# Altium PCB WOLFMAN.PcbDoc (part 1 of 2)
Units mm, origin at the board's own origin, x right, y up, seen from the top; angles counter-clockwise.
Board outline 40.9 x 21.1 mm, 4 copper layers (Top Layer, Signal Layer 1, Signal Layer 2, Bottom Layer), stack 0.778 mm thick; 122 components, 134 nets, 498 pads, 111 vias.
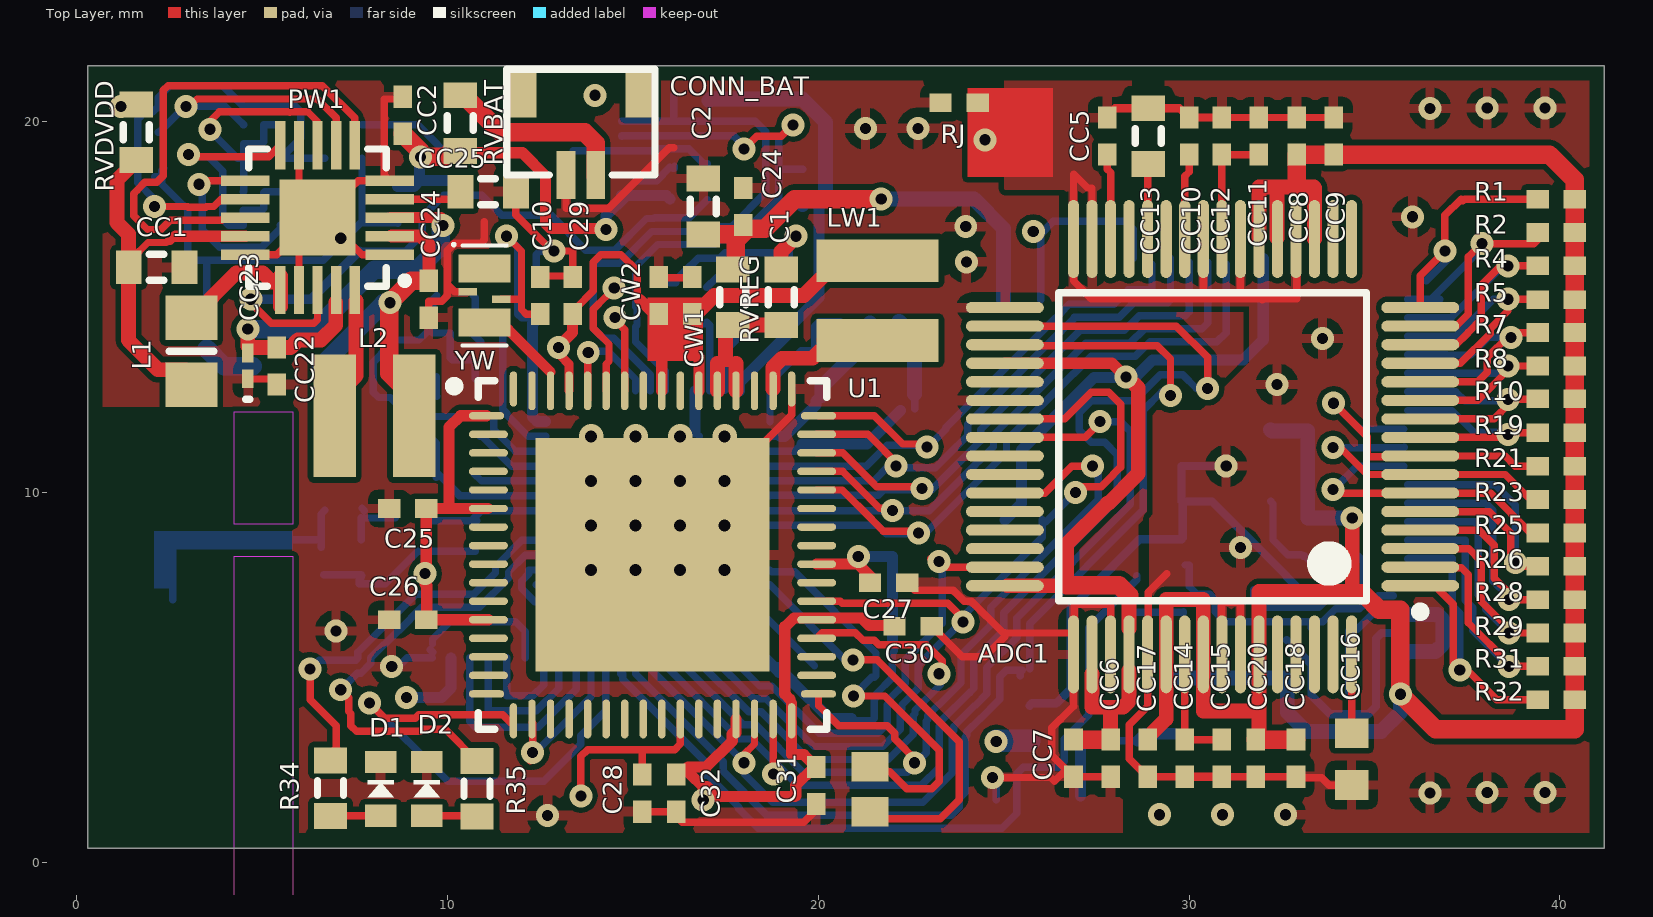
[diagram p0: Top Layer view]
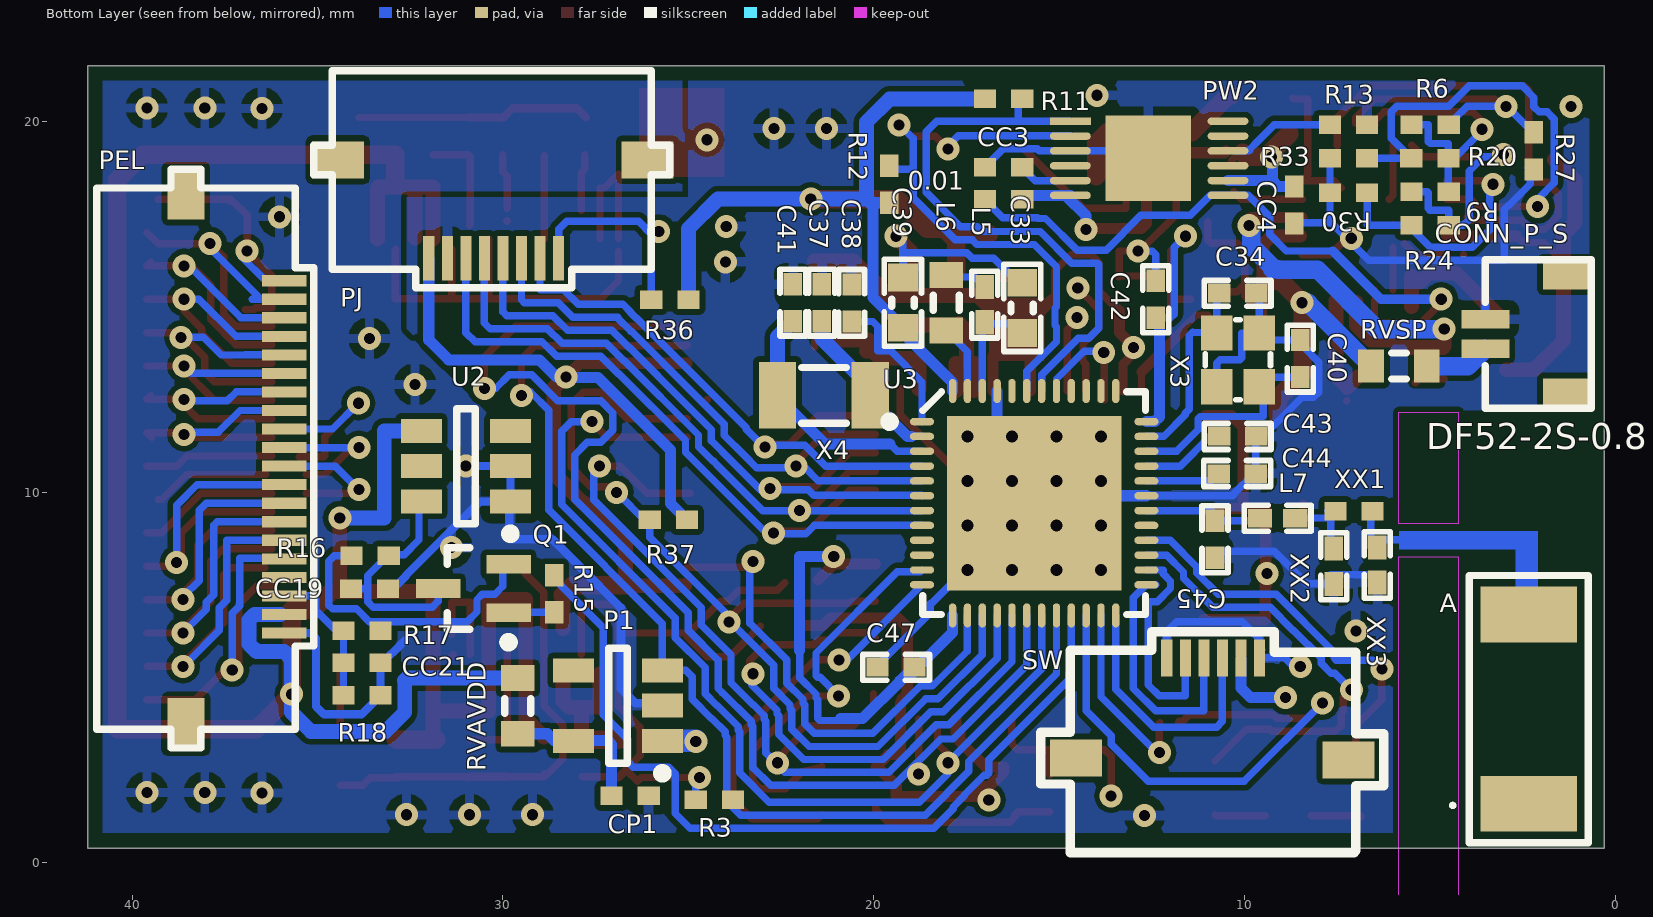
[diagram p1: Bottom Layer view, seen from below]
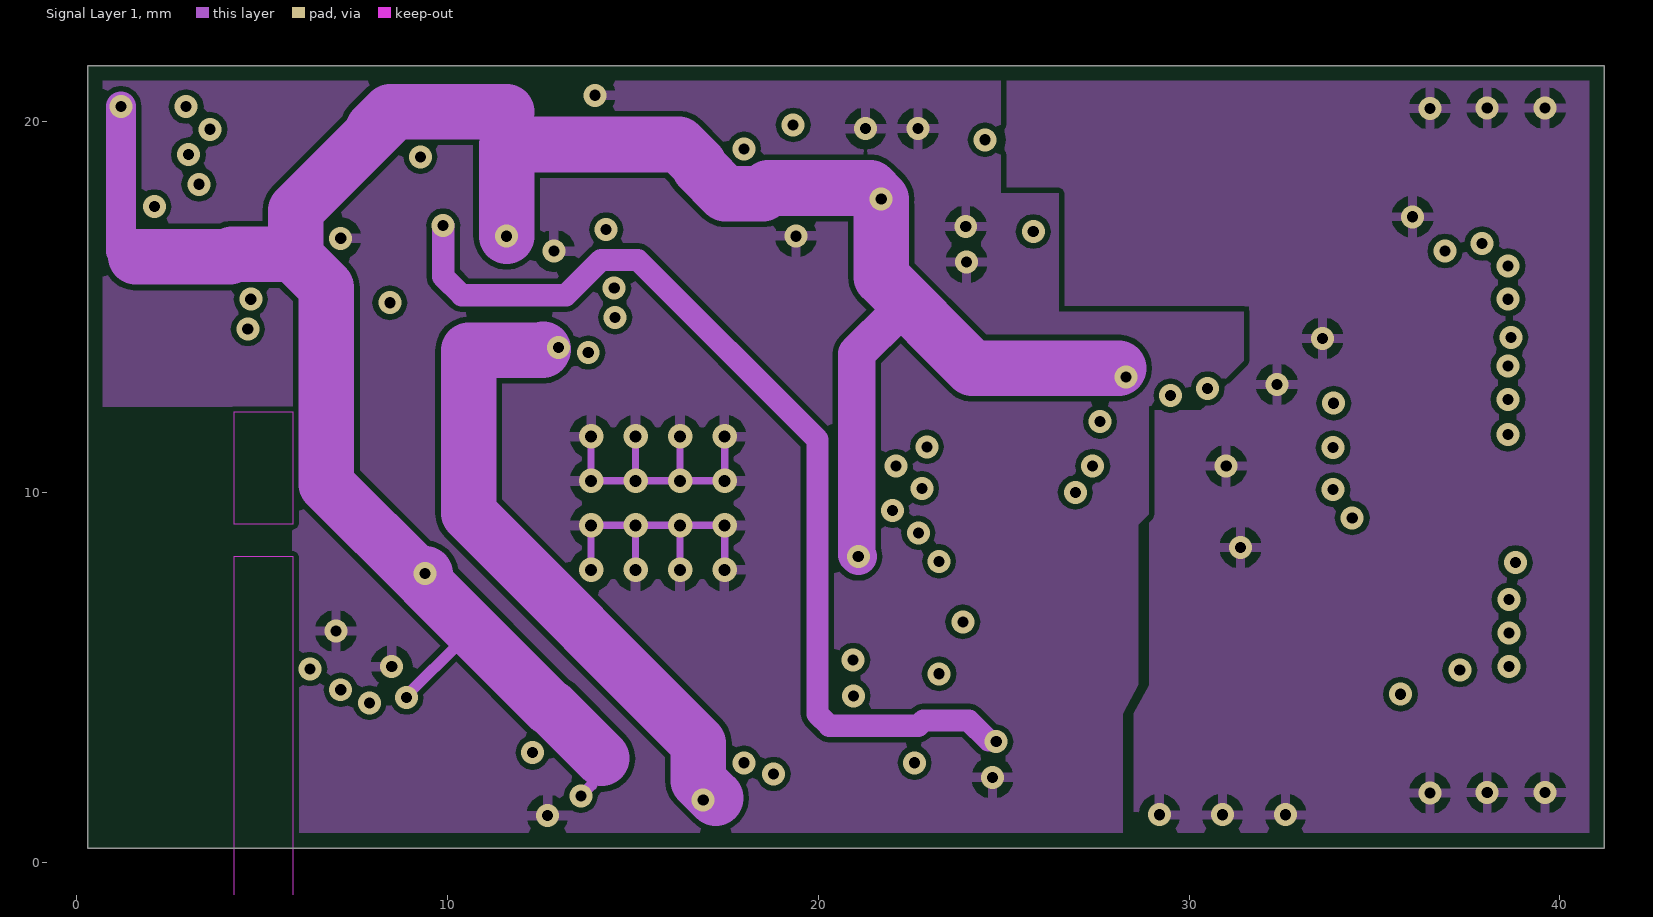
[diagram p2: Signal Layer 1]
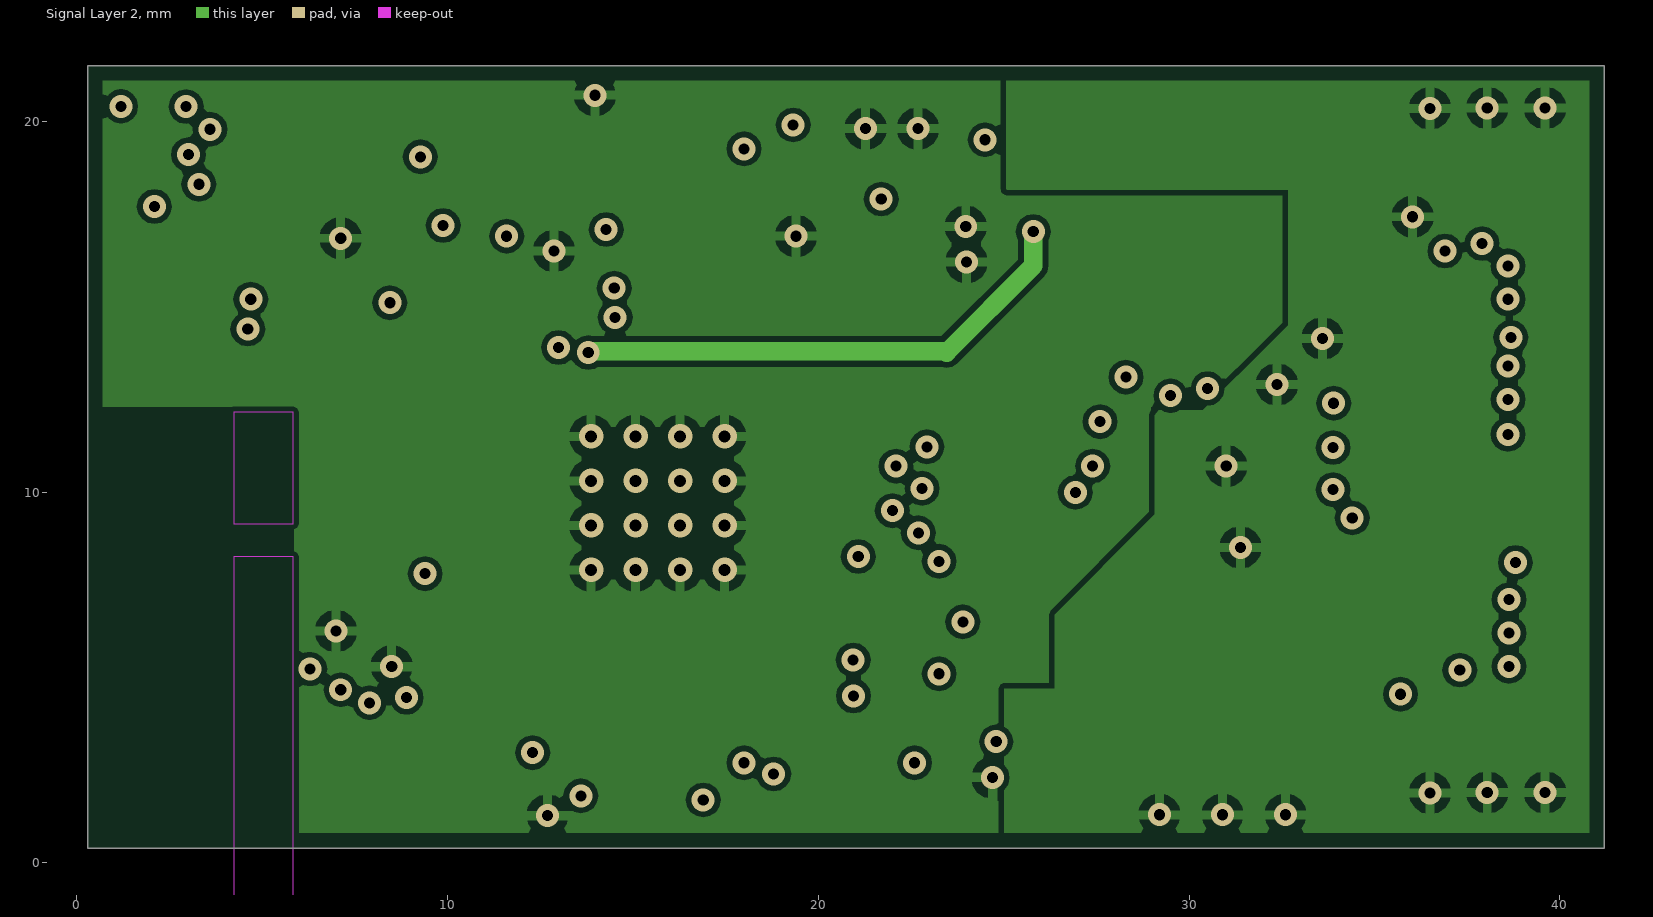
[diagram p3: Signal Layer 2]

## Layer stack, top to bottom
Top Solder: solder mask 0.0102, Solder Resist, Dk 3.5
Top Layer: signal copper 0.0356
Dielectric 1: core 0.254, FR-4, Dk 4.2
Signal Layer 1: signal copper 0.036
Dielectric 3: prepreg 0.127, Dk 4.2
Signal Layer 2: signal copper 0.036
Dielectric 2: core 0.254, Dk 4.2
Bottom Layer: signal copper 0.0356
Bottom Solder: solder mask 0.0102, Solder Resist, Dk 3.5

## Board outline
0.3,21.5 0.3,0.4 41.2,0.4 41.2,21.5

## Design rules (kind name [scope] priority, off if disabled: settings)
BoardOutlineClearance [All] p1: gap=0.406 ignorepadtopadclearanceinfootprint=FALSE
Clearance [All] p1: gap=0.15 ignorepadtopadclearanceinfootprint=FALSE except(0: Arc-Hole Track-Hole SMDPad-Hole THPad-Hole Via-Hole Fill-Hole Poly-Hole Region-Hole Text-Hole)
PolygonConnect [All] p1: connectstyle=Relief reliefconductorwidth=0.254 reliefentries=4 polygonreliefangle="90 Angle" airgapwidth=0.254
RoutingVias [All] p1: holewidth=0.3 width=0.62 viastyle="Through Hole" minholewidth=0.3 minwidth=0.62 maxholewidth=0.3 maxwidth=0.62
SolderMaskExpansion [All] p1: expansion=0.102
Width [All] p1: maxlimit=25 minlimit=0.2 preferedwidth=0.2 toplayer_maxwidth=2.5 midlayer1_maxwidth=2.5 midlayer2_maxwidth=2.5 minimp=50.000000 maximp=50.000000 favimp=50.000000
30 further rules are at their usual default settings.

## Classes and differential pairs
component class 03_ANALOG: ADC1 CC5 CC6 CC7 CC8 CC9 CC10 CC11 CC12 CC13 CC14 CC15 CC16 CC17 CC18 CC19 CC20 CC21 PEL Q1 R1 R2 R4 R5 R7 R8 R10 R15 R16 R17 R18 R19 R21 R23 R25 R26 R28 R29 R31 R32 R37 RJ U2
component class 04_POWER: 0.01 CC1 CC2 CC3 CC4 CC22 CC23 CC24 CC25 CC? CONN_BAT CONN_P_S CP1 L1 L2 P1 PW1 PW2 R6 R9 R11 R12 R13 R14 R20 R24 R27 R30 R33 R? RVAVDD RVBAT RVDVDD RVSP
component class 01_MRWOLF: C1 C2 C10 C24 C25 C26 C27 C28 C29 C30 C31 C32 CW1 CW2 LW1 PJ R36 RVREG U1 YW
component class 02_NRF52832: A C33 C34 C37 C38 C39 C40 C41 C42 C43 C44 C45 C47 D1 D2 L5 L6 L7 R3 R34 R35 SW U3 X3 X4 XX1 XX2 XX3

## Components (designator, comment, footprint, x,y, rotation, side; value= is the part's Value field where it differs from the comment)
0.01 "0.01" 0402 16.5,17.893 r0 bottom (schematic designator =Value)
A "FR05-S1-N-0-102" DFN510P700X220-2N 2.34,4.125 r90 bottom
ADC1 "ADS1298IPAG" LQFP64_M 30.634,11.224 r180 top
C1 "NC" J1-0603 19,15.257 r270 top
C2 "NC" J1-0603 16.9,17.7 r270 top
C10 "100nF" 0402 12.5,15.3 r270 top
C24 "100nF" 0402 17.975,17.7 r270 top
C25 "100nF" 0402 8.932,9.557 r0 top
C26 "100nF" 0402 8.932,6.557 r0 top
C27 "100nF" 0402 21.9,7.557 r180 top
C28 "100nF" 0402 15.25,1.883 r90 top
C29 "100nF" 0402 13.381,15.3 r270 top
C30 "100nF" 0402 22.561,6.379 r180 top
C31 "100nF" 0402 19.945,2.09 r90 top
C32 "100nF" 0402 16.167,1.883 r90 top
C33 "1.0µF" CAPC1608X06L 16,14.968 r270 bottom
C34 "12pF" CAPC1005X04L 10.189,15.357 r180 bottom
C37 "12pF" CAPC1005X04L 21.4,15.107 r90 bottom
C38 "100nF" CAPC1005X04L 20.6,15.1 r90 bottom
C39 "4.7µF" CAPC1608X06L 19.215,15.107 r90 bottom
C40 "12pF" CAPC1005X04L 8.5,13.6 r90 bottom
C41 "12pF" CAPC1005X04L 22.18,15.107 r90 bottom
C42 "100nF" CAPC1005X04L 12.4,15.2 r90 bottom
C43 "100pF" CAPC1005X04L 10.189,11.5 r180 bottom
C44 "N.C." CAPC1005X04L 10.2,10.5 r0 bottom
C45 "0.8pF" CAPC1005X04L 10.8,8.728 r90 bottom
C47 "100nF" CAPC1005X04L 19.4,5.272 r0 bottom
CC1 "22uF" J1-0603 2.16,16.06 r180 top
CC2 "10uF" 0402 8.8,20.16 r270 top
CC3 "0.47UF" 0402 16.5,18.755 r180 bottom
CC4 "1UF" 0402 8.664,17.742 r90 bottom
CC5 "Cap Semi" 0402 27.79,19.6 r270 top
CC6 "100nF" 0402 27.884,2.826 r90 top
CC7 "1uF" 0402 26.884,2.826 r90 top
CC8 "Cap Semi" 0402 32.9,19.6 r270 top
CC9 "Cap Semi" 0402 33.9,19.6 r270 top
CC10 "Cap Semi" 0402 30,19.6 r270 top
CC11 "Cap Semi" 0402 31.884,19.6 r270 top
CC12 "Cap Semi" 0402 30.884,19.6 r270 top
CC13 "Cap Semi" J1-0603 28.9,19.6 r270 top
CC14 "Cap Semi" 0402 29.884,2.826 r90 top
CC15 "Cap Semi" 0402 30.884,2.826 r90 top
CC16 "Cap Semi" 1608[0603] 34.384,2.8 r90 top
CC17 "100nF" 0402 28.884,2.826 r90 top
CC18 "10uF" 0402 32.884,2.826 r90 top
CC19 "100nF" 0402 33.6,7.398 r0 bottom
CC20 "Cap Semi" 0402 31.8,2.826 r90 top
CC21 "100nF" 0402 33.8,5.4 r0 bottom
CC22 "4.7uF" 0402 5.4,13.4 r90 top
CC23 "100nF" 0603 4.62,13.4 r90 top
CC24 "4.7uF" 0402 9.5,15.2 r90 top
CC25 "10nF" J1-0603 11.1,18.1 r180 top
CONN_BAT "DF52-2S-0.8H(21)" DF52-2S-0.8H(21) 13.6,20.3 r180 top
CONN_P_S "DF52-2S-0.8H(21)" DF52-2S-0.8H(21) 1.76,14.264 r90 bottom
CP1 "1uF" 0402 26.57,1.81 r0 bottom
CW1 "4.7uF" 0402 16.6,15.3 r270 top
CW2 "100nF" 0402 15.7,15.3 r270 top
D1 "LED Red" DIOC1608X08L 8.2,2 r90 top
D2 "LED Orange" DIOC1608X08L 9.446,2 r90 top
L1 "MLZ2012N100L" 6-0805_N 3.1,13.8 r270 top
L2 "LQH3NPZ220MJRL" 1212_PCK 8.56,20.657 r180 top
L5 "LQW15AN15NJ00D" INDC1005X04L 17.005,15.055 r90 bottom
L6 "L0603B100KDWFT" J1-0603 18.05,15.107 r270 bottom
L7 "3.9nH" INDC1005X04L 9.11,9.297 r180 bottom
LW1 "SRN4026-220M" 1212_PCK 13,15.687 r270 top
P1 "ADP122AUJZ_2p7" UJ-5_N 26.9,4.241 r0 bottom
PEL "MOLEX_5051102091" MOLEX_5051102091 35.95,10.95 r90 bottom
PJ "MOLEX_5051100892" MOLEX_5051100892 30.25,17.757 r180 bottom
PW1 "BQ25570RGRT" VQFN20 6.5,17.4 r90 top
PW2 "BQ27441-G1" DRZ12_SMALL 15.2,20 r180 bottom
Q1 "PMSS3906" SOT323_N 30.8,7.4 r0 bottom
R1 "4.7K" 0402 39.9,17.9 r180 top
R2 "4.7K" 0402 39.9,17 r180 top
R3 "100K" 0402 24.3,1.7 r0 bottom
R4 "4.7K" 0402 39.9,16.1 r180 top
R5 "4.7K" 0402 39.9,15.187 r180 top
R6 "7M32" 0402 5,19.9 r180 bottom
R7 "4.7K" 0402 39.9,14.304 r180 top
R8 "4.7K" 0402 39.9,13.4 r180 top
R9 "1M24" 0402 5,18.1 r0 bottom
R10 "4.7K" 0402 39.9,12.512 r180 top
R11 "1M" 0402 16.5,20.6 r180 bottom
R12 "1M" 0402 19.581,18.3 r90 bottom
R13 "10K" 0402 7.2,19.9 r180 bottom
R15 "4.7K" 0402 28.62,7.258 r270 bottom
R16 "4.7K" 0402 33.582,8.288 r0 bottom
R17 "4.7K" 0402 33.8,6.265 r0 bottom
R18 "22K" 0402 33.8,4.518 r0 bottom
R19 "4.7K" 0402 39.9,11.6 r180 top
R20 "4M22" 0402 5.006,19 r0 bottom
R21 "4.7K" 0402 39.9,10.7 r180 top
R23 "4.7K" 0402 39.9,9.8 r180 top
R24 "6M65" 0402 5,17.192 r0 bottom
R25 "4.7K" 0402 39.9,8.897 r180 top
R26 "4.7K" 0402 39.9,8 r180 top
R27 "5M6" 0402 2.2,19.2 r270 bottom
R28 "4.7K" 0402 39.9,7.1 r180 top
R29 "4.7K" 0402 39.9,6.2 r180 top
R30 "4M99" 0402 7.2,18.069 r0 bottom
R31 "4.7K" 0402 39.9,5.3 r180 top
R32 "4.7K" 0402 39.9,4.4 r180 top
R33 "8M66" 0402 7.2,19 r0 bottom
R34 "" J1-0603 6.85,2.018 r90 top
R35 "" J1-0603 10.8,2 r90 top
R36 "NC" 0402 25.5,15.184 r180 bottom
R37 "NC" 0402 25.54,9.25 r180 bottom
RJ "0R" 0402 23.8,20.5 r0 top
RVAVDD "1" J1-0603 29.6,4.233 r90 bottom
RVBAT "1" J1-0603 10.353,19.95 r270 top
RVDVDD "1" J1-0603 1.611,19.7 r90 top
RVREG "" J1-0603 17.7,15.257 r90 top
RVSP "1" J1-0603 5.84,13.4 r0 bottom
SW "MOLEX_5051100692" MOLEX_5051100692 12.85,2.729 r0 bottom
U1 "Mr. Wolf PULP" QFN50P900X900X100_HS_NOVIAS_65M 15.533,8.307 r0 top
U2 "LT1790-2p048" SOT-23_A_N 31,10.7 r0 bottom
U3 "nRF52832-QFAA" QFN40P600X600X90-48N 15.675,9.7 r180 bottom
X3 "FA-128 32.0000MF10Z-AJ3-ND" BT-XTAL_2016 10.182,13.565 r90 bottom
X4 "ABS07AIG-32.768kHz-9-1-T" XTAL_3215 21.346,12.608 r0 bottom
XX1 "0" 0402 7.05,9.483 r180 bottom
XX2 "NC" INDC1005X04L 7.6,8 r270 bottom
XX3 "NC" INDC1005X04L 6.422,8.033 r270 bottom
YW "SIT1533AC-H5-DCC-32.768E" SiT1533-C 11,15.3 r270 top

## Footprints (in the part's own frame and the unit in brackets; to place one, negate y for a bottom-side part, rotate by r counter-clockwise, add the part's x,y. Pads: shape width x height; smd on the part's side, far side on the other; paste and mask are expansions set on the pad)
6-0805_N [mm] "Chip Resistor, Body 2.0x1.2mm, IPC Medium Density"
  rect 1.2x1.4 smd: 1(-0.9,0) 2(0.9,0)
  silkscreen extent 0,-0.6 0,0.6, body extent -1.07,-0.7 1.07,0.7, height 0.7
0402 [mm] "Chip Capacitor, Body 1.0x0.5mm, IPC High Density"
  rect 0.6x0.5 smd: 1(-0.5,0) 2(0.5,0)
  body extent -0.55,-0.3 0.55,0.3, height 1.3
0603 [mm] "Chip Inductor, Body 0.6x0.3mm, IPC High Density"
  rect 0.5x0.3 smd: 1(-0.35,0) 2(0.35,0)
  silkscreen extent -0.9,-0.05 -0.9,0.05, body extent -0.33,-0.18 0.33,0.18, height 0.55
1212_PCK [mm]
  rect 1.15x3.3 smd: 1(-0.55,8.6) 2(1.6,8.6)
1608[0603] [mm] "Chip Capacitor, Body 1.6x0.8mm, IPC High Density"
  rect 0.8x0.9 smd: 1(-0.7,0) 2(0.7,0)
  body extent -0.87,-0.48 0.87,0.48, height 1.3
BT-XTAL_2016 [mm]
  rect 0.95x0.85 smd: 1(-0.725,-0.575) 2(0.725,-0.575) 3(0.725,0.575) 4(-0.725,0.575)
  silkscreen extent -1.08,-0.88 1.08,0.88, body extent -1.05,-0.85 1.05,0.85, height 0.56
CAPC1005X04L [mm]
  rect 0.6x0.5 smd: 1(-0.5,0) 2(0.5,0)
  silkscreen extent -0.9,-0.35 0.9,0.35, body extent -0.51,-0.25 0.51,0.25, height 0.5
CAPC1608X06L [mm]
  rect 0.75x0.8 smd: 1(-0.675,0) 2(0.675,0)
  silkscreen extent -1.17,-0.5 1.17,0.5, body extent -0.8,-0.43 0.8,0.43, height 0.8
DF52-2S-0.8H(21) [mm]
  rect 0.8x1.4 smd: 0(-1.6,-0.5) 0(1.6,-0.5)
  rect 0.5x1.3 smd: 1(-0.4,1.75) 2(0.4,1.75)
  silkscreen extent -2,-1.1 2,1.75, body extent -1.9,-1.05 1.9,1.72, height 1.66
DFN510P700X220-2N [mm]
  rect 1.5x2.6 smd: 1(2.575,0) 2(-2.525,0)
  Top Layer region: 3.277,0.25 4.827,0.25 4.827,-0.25 3.277,-0.25
  Top Layer region: 4.327,3.5 4.827,3.5 4.827,-0.225 4.327,-0.225
  Keep-Out Layer region: -6.973,3.5 4.127,3.5 4.127,1.9 -6.973,1.9
  Keep-Out Layer region: 5.027,3.5 8.027,3.5 8.027,1.9 5.027,1.9
  silkscreen extent -3.57,-1.6 3.62,2.1, body extent -3.58,-1.6 3.62,1.6, height 2.2
DIOC1608X08L [mm] "Chip Diode, 2-Leads, Body 1.60x0.80mm, IPC High Density"
  rect 0.6x0.85 smd: 1(-0.725,0) 2(0.725,0)
  silkscreen extent -0.23,-0.35 0.23,0.35, body extent -0.8,-0.4 0.81,0.4, height 0.72
DRZ12_SMALL [mm]
  rect 2.3x2.3 smd: 0(2.6,-1)
  rect 1.1x0.2 smd: 1(0.5,0)
  oval 1.1x0.2 smd: 2(0.5,-0.4) 3(0.5,-0.8) 4(0.5,-1.2) 5(0.5,-1.6) 6(0.5,-2) 7(4.75,-2) 8(4.75,-1.6) 9(4.75,-1.2) 10(4.75,-0.8) 11(4.75,-0.4) 12(4.75,0)
INDC1005X04L [mm]
  rect 0.65x0.5 smd: 1(-0.475,0) 2(0.475,0)
  silkscreen extent -0.9,-0.35 0.9,0.35, body extent -0.5,-0.3 0.5,0.3, height 0.5
J1-0603 [mm] "Chip Resistor, Body 1.6x0.8mm, IPC High Density"
  rect 0.7x0.9 smd: 1(-0.75,0) 2(0.75,0)
  silkscreen extent -0.2,-0.35 0.2,0.35, body extent -0.85,-0.48 0.85,0.48, height 0.9
LQFP64_M [mm] "Thin QFP, 64-Leads, Body 10x10mm, Pitch 0.5mm, IPC Low Density"
  oval 2.1x0.3 smd: 1(-5.6,3.75) 2(-5.6,3.25) 3(-5.6,2.75) 4(-5.6,2.25) 5(-5.6,1.75) 6(-5.6,1.25) 7(-5.6,0.75) 8(-5.6,0.25) 9(-5.6,-0.25) 10(-5.6,-0.75) 11(-5.6,-1.25) 12(-5.6,-1.75) 13(-5.6,-2.25) 14(-5.6,-2.75) 15(-5.6,-3.25) 16(-5.6,-3.75) 33(5.6,-3.75) 34(5.6,-3.25) 35(5.6,-2.75) 36(5.6,-2.25) 37(5.6,-1.75) 38(5.6,-1.25) 39(5.6,-0.75) 40(5.6,-0.25) 41(5.6,0.25) 42(5.6,0.75) 43(5.6,1.25) 44(5.6,1.75) 45(5.6,2.25) 46(5.6,2.75) 47(5.6,3.25) 48(5.6,3.75)
  oval 0.3x2.1 smd: 17(-3.75,-5.6) 18(-3.25,-5.6) 19(-2.75,-5.6) 20(-2.25,-5.6) 21(-1.75,-5.6) 22(-1.25,-5.6) 23(-0.75,-5.6) 24(-0.25,-5.6) 25(0.25,-5.6) 26(0.75,-5.6) 27(1.25,-5.6) 28(1.75,-5.6) 29(2.25,-5.6) 30(2.75,-5.6) 31(3.25,-5.6) 32(3.75,-5.6) 49(3.75,5.6) 50(3.25,5.6) 51(2.75,5.6) 52(2.25,5.6) 53(1.75,5.6) 54(1.25,5.6) 55(0.75,5.6) 56(0.25,5.6) 57(-0.25,5.6) 58(-0.75,5.6) 59(-1.25,5.6) 60(-1.75,5.6) 61(-2.25,5.6) 62(-2.75,5.6) 63(-3.25,5.6) 64(-3.75,5.6)
  silkscreen extent -5.72,-4.15 4.15,4.57, body extent -5,-5 5,5, height 1.6
MOLEX_5051100692 [mm] "FFC & FPC Connectors 0.5 FPC ZIF BTM CONT EMBT PKG 6Ckt"
  rect 1.4x1 smd: 0(-5.65,-0.05) 0(1.7,-0.1)
  rect 0.3x1 smd: 1(-3.25,-2.8) 2(-2.75,-2.8) 3(-2.25,-2.8) 4(-1.75,-2.8) 5(-1.25,-2.8) 6(-0.75,-2.8)
  silkscreen extent -6.6,-3.5 2.65,2.45, body extent -6.25,-3 2.25,2.3, height 1.88
MOLEX_5051100892 [mm] "CONN FCC 8 poles, 0.5mm"
  rect 1.4x1 smd: 0(-4.2,1.2) 0(4.15,1.2)
  rect 0.3x1.2 smd: 1(-1.75,-1.45) 2(-1.25,-1.45) 3(-0.75,-1.45) 4(-0.25,-1.45) 5(0.25,-1.45) 6(0.75,-1.45) 7(1.25,-1.45) 8(1.75,-1.45)
  silkscreen extent -4.85,-2.25 4.75,3.6, body extent -4.75,-1.65 4.75,3.65, height 1.88
MOLEX_5051102091 [mm] "CONN FCC 20 poles, 0.5mm"
  rect 1.4x1 smd: 0(-7.2,2.6) 0(7.1,2.6)
  rect 0.3x1.2 smd: 1(-4.75,-0.05) 2(-4.25,-0.05) 3(-3.75,-0.05) 4(-3.25,-0.05) 5(-2.75,-0.05) 6(-2.25,-0.05) 7(-1.75,-0.05) 8(-1.25,-0.05) 9(-0.75,-0.05) 10(-0.25,-0.05) 11(0.25,-0.05) 12(0.75,-0.05) 13(1.25,-0.05) 14(1.75,-0.05) 15(2.25,-0.05) 16(2.75,-0.05) 17(3.25,-0.05) 18(3.75,-0.05) 19(4.25,-0.05) 20(4.75,-0.05)
  silkscreen extent -7.85,-0.85 7.75,5, body extent -7.75,-0.3 7.75,5, height 1.88
QFN40P600X600X90-48N [mm]
  oval 0.65x0.2 smd: 1(-3.025,2.2) 2(-3.025,1.8) 3(-3.025,1.4) 4(-3.025,1) 5(-3.025,0.6) 6(-3.025,0.2) 7(-3.025,-0.2) 8(-3.025,-0.6) 9(-3.025,-1) 10(-3.025,-1.4) 11(-3.025,-1.8) 12(-3.025,-2.2) 25(3.025,-2.2) 26(3.025,-1.8) 27(3.025,-1.4) 28(3.025,-1) 29(3.025,-0.6) 30(3.025,-0.2) 31(3.025,0.2) 32(3.025,0.6) 33(3.025,1) 34(3.025,1.4) 35(3.025,1.8) 36(3.025,2.2)
  oval 0.2x0.65 smd: 13(-2.2,-3.025) 14(-1.8,-3.025) 15(-1.4,-3.025) 16(-1,-3.025) 17(-0.6,-3.025) 18(-0.2,-3.025) 19(0.2,-3.025) 20(0.6,-3.025) 21(1,-3.025) 22(1.4,-3.025) 23(1.8,-3.025) 24(2.2,-3.025) 37(2.2,3.025) 38(1.8,3.025) 39(1.4,3.025) 40(1,3.025) 41(0.6,3.025) 42(0.2,3.025) 43(-0.2,3.025) 44(-0.6,3.025) 45(-1,3.025) 46(-1.4,3.025) 47(-1.8,3.025) 48(-2.2,3.025)
  rect 4.7x4.7 smd: 49(0,0)
  silkscreen extent -4.03,-3 3,3, body extent -3.02,-3.02 3.02,3.02, height 0.86
QFN50P900X900X100_HS_NOVIAS_65M [mm] "QFN, 64-Leads, Body 9.00x9.00mm, Pitch 0.50mm, Thermal Pad 6.30x6.30mm, IPC Low Density"
  oval 0.95x0.2 smd: 1(-4.475,3.75) 16(-4.475,-3.75) 33(4.475,-3.75) 48(4.475,3.75)
  oval 1.05x0.2 smd: 2(-4.425,3.25) 3(-4.425,2.75) 4(-4.425,2.25) 5(-4.425,1.75) 6(-4.425,1.25) 7(-4.425,0.75) 8(-4.425,0.25) 9(-4.425,-0.25) 10(-4.425,-0.75) 11(-4.425,-1.25) 12(-4.425,-1.75) 13(-4.425,-2.25) 14(-4.425,-2.75) 15(-4.425,-3.25) 34(4.425,-3.25) 35(4.425,-2.75) 36(4.425,-2.25) 37(4.425,-1.75) 38(4.425,-1.25) 39(4.425,-0.75) 40(4.425,-0.25) 41(4.425,0.25) 42(4.425,0.75) 43(4.425,1.25) 44(4.425,1.75) 45(4.425,2.25) 46(4.425,2.75) 47(4.425,3.25)
  oval 0.2x0.95 smd: 17(-3.75,-4.475) 32(3.75,-4.475) 49(3.75,4.475) 64(-3.75,4.475)
  oval 0.2x1.05 smd: 18(-3.25,-4.425) 19(-2.75,-4.425) 20(-2.25,-4.425) 21(-1.75,-4.425) 22(-1.25,-4.425) 23(-0.75,-4.425) 24(-0.25,-4.425) 25(0.25,-4.425) 26(0.75,-4.425) 27(1.25,-4.425) 28(1.75,-4.425) 29(2.25,-4.425) 30(2.75,-4.425) 31(3.25,-4.425) 50(3.25,4.425) 51(2.75,4.425) 52(2.25,4.425) 53(1.75,4.425) 54(1.25,4.425) 55(0.75,4.425) 56(0.25,4.425) 57(-0.25,4.425) 58(-0.75,4.425) 59(-1.25,4.425) 60(-1.75,4.425) 61(-2.25,4.425) 62(-2.75,4.425) 63(-3.25,4.425)
  rect 6.3x6.3 smd: 65(0,0)
  silkscreen extent -5.47,-4.7 4.7,4.7, body extent -4.6,-4.6 4.6,4.6, height 1
SiT1533-C [mm] "Ultra-Low Power Quartz XTAL Replacement - XTAL Compatible Footprint"
  rect 0.75x1.4 smd: 1(-0.725,0) 3(0.725,0)
  rect 0.2x0.5 smd: 2(-0.1,-0.45) 4(0.1,0.45)
  silkscreen extent -1.4,-0.85 1.35,0.6, body extent -1,-0.6 1,0.6, height 0.55
SOT323_N [mm] "SOT323, 3-Leads, Body 2.0x1.3mm, Pitch 0.65mm, Lead Span 2.1mm, IPC Medium Density"
  rect 1.2x0.5 smd: 1(-0.95,0.65) 2(-0.95,-0.65) 3(0.95,0)
  silkscreen extent -1.07,-1.1 0.7,1.57, body extent -0.7,-1.1 0.7,1.1, height 1.1
SOT-23_A_N [mm] "SOT23, 6-Leads, Body 2.9x1.7mm, Pitch 0.95mm, Lead Span 2.8mm, IPC Medium Density"
  rect 1.1x0.65 smd: 1(-1.2,0.95) 2(-1.2,0) 3(-1.2,-0.95) 4(1.2,-0.95) 5(1.2,0) 6(1.2,0.95)
  silkscreen extent -1.32,-1.55 0.25,1.95, body extent -0.9,-1.55 0.9,1.55, height 1.45
UJ-5_N [mm] "SOT23, 5-Leads, Body 2.9x1.7mm, Pitch 0.95mm, Lead Span 2.8mm, IPC Medium Density"
  rect 1.1x0.65 smd: 1(-1.2,0.95) 2(-1.2,0) 3(-1.2,-0.95) 4(1.2,-0.95) 5(1.2,0.95)
  silkscreen extent -1.32,-1.55 0.25,1.95, body extent -0.9,-1.55 0.9,1.55, height 1
VQFN20 [mm]
  rect 0.28x1.3 smd: 1(-1,-1.95) 2(-0.5,-1.95) 3(0,-1.95) 4(0.5,-1.95) 5(1,-1.95) 11(1,1.95) 12(0.5,1.95) 13(0,1.95) 14(-0.5,1.95) 15(-1,1.95)
  rect 1.3x0.28 smd: 6(1.95,-1) 7(1.95,-0.5) 8(1.95,0) 9(1.95,0.5) 10(1.95,1) 16(-1.95,1) 17(-1.95,0.5) 18(-1.95,0) 19(-1.95,-0.5) 20(-1.95,-1)
  rect 2.05x2.05 smd: 21(0,0)
  silkscreen extent -1.85,-2.42 1.85,1.85, body extent -1.75,-1.75 1.75,1.75, height 1
XTAL_3215 [mm]
  rect 1x1.8 smd: 1(-1.25,0) 2(1.25,0)
  silkscreen extent -0.6,-0.75 0.6,0.75, body extent -1.6,-0.75 1.6,0.75, height 0.81

## Part data
0.01 R1 R2 R3 R4 R5 R6 R7 R8 R9 R10 R11 R12 R13 R15 R16 R17 R18 R19 R20 R21 R23 R24 R25 R26 R27 R28 R29 R30 R31 R32 R33 R34 R35 R36 R37 RJ RVAVDD RVBAT RVDVDD RVREG RVSP XX1: library part Res3, "Resistor"
A: "Bluetooth antenna"
ADC1: library part ADS1298
C1 C2 C10 C24 C25 C26 C27 C28 C29 C30 C31 C32 CC1 CC2 CC3 CC4 CC6 CC7 CC17 CC18 CC19 CC21 CC22 CC23 CC24 CC25 CP1 CW1 CW2: library part "Cap Semi", "Capacitor (Semiconductor SIM Model)"
C33: library part C0603-1µ0, "Capacitor, X7R, ±10%"
C34 C37 C40 C41: library part C0402-12p, "Capacitor, NP0, ±2%"
C38 C42 C47: library part C0402-100n, "Capacitor, X7R, ±10%"
C39: library part C0603-4µ7, "Capacitor, X5R, ±10%"
C43: library part C0402-100p, "Capacitor, NP0, ±5%"
C44: library part C0402-N.C., "Not mounted"
C45: library part C0402-0.8p, "Capacitor, NP0, ±5%"
CC5 CC8 CC9 CC10 CC11 CC12 CC13 CC14 CC15 CC16 CC20: "Capacitor (Semiconductor SIM Model)"
D1: library part KING-LED-RED-APT1608LSECK/J3-PRV, "1.6X0.8mm SMD CHIP LED LAMP, Hyper Red"
D2: library part KING-LED-ORANGE-APT1608LSECK/J4-PRV, "1.6X0.8mm SMD CHIP LED LAMP, Super Bright Orange"
L1 L2: library part Inductor, "Inductor"
L5: library part L0402-15n, "High frequency chip inductor ±10%"
L6: library part L0603-10µ, "Chip inductor, IDC,min = 50 mA, ±20%"
L7: library part L0402-3n9, "High frequency chip inductor ±5%"
LW1: library part BOUR-IND-SRN4026-220M, "Semi-shielded Power Inductor, 22uH, 3A"
P1: library part ADP122, "Regulator"
PW1: "IC ENERGY HARV CTRLR BATT 20VQFN"
Q1: "PNP Switching Transistor"
U1: library part PULP_MR_WOLF, "Mr. Wolf PULP Heterogeneous Multi-Core System-On-Chip"
U2: library part LT1790
U3: library part nRF52832-QFAB, "Multi-protocol Bluetooth Low Energy, ANT and 2.4GHz proprietary system-on-chip"
X3: library part XTAL_SMD2016_32MHz_8pF_General, "XTAL SMD 2016, 32MHz, Cl=8pF, Total Tol: ±40ppm"
X4: library part XTAL_SMD3215_32.768kHz_9pF_General, "XTAL SMD 3215, 32.768kHz, Cl=9pF, Total Tol: ±50ppm"
XX2 XX3: library part L0402-N.C., "Not mounted"
YW: library part SIT-OSC32KHZ-SIT1533AC-H5-DCC-32.768, "20 ppm, Ultra-Low Power 32.768 kHz Quartz XTAL Replacement"

## Free pads (board coordinates)
  rect 1x0.8 smd: 2(21.4,2.589) 3(21.4,1.38)

## Via types
v1: diameter 0.62, hole 0.3, Top Layer to Bottom Layer, 80 vias
v2: diameter 0.66, hole 0.33, Top Layer to Bottom Layer, 16 vias
v3: diameter 0.62, hole 0.3, Top Layer to Bottom Layer, tented both sides, 14 vias
v4: diameter 0.62, hole 0.3, Top Layer to Bottom Layer, tented bottom, 1 vias

## Nets (pads, with @x,y where several pads share a name; then routed paths per layer and width w, separated by ;. In a path a pad name is that pad's centre, name@x,y a point inside that pad or via, vN(x,y) a via of type N, cw(c..) or ccw(c..) an arc to the next point about the centre after c; other vN are vias at no path point)
AGND: ADC1.20 ADC1.23 ADC1.25 ADC1.31 ADC1.32 ADC1.53 ADC1.57 ADC1.58 CC5.1 CC8.1 CC9.1 CC10.1 CC11.1 CC12.1 CC13.1 CC14.1 CC15.1 CC16.1 CC17.1 CC18.1 CC19.1 CC20.1 CC21.1 CP1.1 P1.2 PEL.1 R18.1 RJ.2 U2.1 U2.2 | length 58.4
  Top Layer w0.2: ADC1.32@26.884,16.5 26.884,15.7 27.368,15.216 30.384,15.216 ; ADC1.32@26.884,16.824 26.884,18.516 ; 26.889,18.577 27.266,18.2 27.384,18.2 ADC1.31@27.384,16.824 ; CC17.1@28.884,2.326 29.85,2.326 CC14.1@29.858,2.318 ; CC17.1@28.884,2.4 28.795,2.4 28.384,2.811 28.384,3.73 28.884,4.23 ADC1.53@28.884,5.624 28.9,5.64 28.9,7.3 29.4,7.8 ; ADC1.25@30.384,16.824 30.384,15.216 ; CC15.1@30.884,2.326 CC15.1@30.92,2.326 ; ADC1.57@30.884,5.624 30.884,7.027 31.384,7.027 ADC1.58@31.384,6.168 ; CC12.1@30.884,20.1 CC11.1@31.884,20.1 CC8.1@32.9,20.1 CC9.1@33.884,20.1 ; CC15.1@30.946,2.3 CC15.1@30.92,2.326 ; ADC1.58@31.333,5.624 ADC1.58@31.4,5.557 ; ADC1.23@31.384,16.55 31.384,15.216 30.384,15.216 ; 31.384,15.3 31.384,15.216 32,15.216 ; 31.971,15.187 32,15.216 ; CC18.1@32.8,2.3 33.576,2.3 33.776,2.1 CC16.1@34.384,2.1 ; ADC1.20@32.884,16.55 32.9,16.534 32.9,15.216 32,15.216 ; CC18.1@32.9,2.326 CC18.1@32.884,2.326 CC20.1@31.8,2.326 CC15.1@30.92,2.326
  Top Layer w0.22: v1(24.494,19.5) 25.817,19.5 ; CC5.1@27.757,20.1 28.007,20.35 CC13.1@28.9,20.35 29.739,20.35 CC10.1@30,20.089 ; CC14.1@29.884,2.326 CC15.1@30.884,2.326 ; CC10.1@30,20.1 30.874,20.1 CC12.1@30.884,20.11
  Bottom Layer w0.22: 29.832,8.765 U2.1@29.832,9.748 ; v3@30.8,10.668 30.768,10.7 U2.2@29.8,10.7 U2.1@29.8,9.75 30.618,9.75 32.61,7.758 32.61,7.736 32.948,7.398 CC19.1@33.1,7.398 ; 32.636,6.015 32.74,5.91 32.74,5.907 33.247,5.4 CC21.1@33.3,5.4 33.3,4.539 R18.1@33.298,4.537 ; R18.1@33.3,4.518 33.81,4.008 34.828,4.008 35.042,4.222 35.042,6.055 35.187,6.2 PEL.1@35.792,6.2
  Bottom Layer w0.23: P1.2@25.7,4.241 25.759,4.3 26.419,4.3 26.817,4.698 26.817,6.874 27.955,8.012 27.955,8.018 28.665,8.728 29.8,8.728
  other v1: 29.2,1.3 30.9,1.3 32.6,1.3 36.5,1.891 38.04,1.9 39.602,1.9 32.368,12.9 33.6,14.14 36.03,17.424 36.5,20.348 38.04,20.357 39.602,20.357
  other v3: 31.385,8.508 31.002,10.7
AVDD: ADC1.19 ADC1.21 ADC1.22 ADC1.54 ADC1.56 ADC1.59 CC8.2 CC9.2 CC17.2 CC18.2 CC20.2 PEL.2 R1.1 R2.1 R4.1 R5.1 R7.1 R8.1 R10.1 R19.1 R21.1 R23.1 R25.1 R26.1 R28.1 R29.1 R31.1 R32.1 RVAVDD.2 U2.4 | length 72.7
  Top Layer w0.4: CC17.2@28.9,3.4 29.384,3.884 ADC1.54@29.384,5.624 ; ADC1.54@29.384,5.64 29.384,7.1 30.384,7.1 ADC1.56@30.384,5.624 30.384,4.1 31.884,4.1 ; ADC1.22@31.884,16.824 31.884,18.224 33.373,18.224 ; CC20.2@31.9,3.326 31.884,3.342 31.884,4.1 ; ADC1.21@32.368,16.852 32.368,18.216 ; ADC1.19@33.384,16.827 33.384,18.2 ; 34.384,7.358 34.4,7.374 v1(34.4,9.304) ; 34.7,7.308 34.687,7.321 31.884,7.321 ADC1.59@31.884,5.624 31.884,4.1
  Top Layer w0.5: CC20.2@31.8,3.326 CC20.2@31.808,3.326 ; CC20.2@31.8,3.334 CC20.2@31.808,3.326 ; CC18.2@32.884,3.342 32.868,3.326 31.9,3.326 CC20.2@31.808,3.326 ; 32.9,18.432 CC8.2@32.9,19.1 CC9.2@33.9,19.1 39.716,19.1 40.4,18.416 R1.1@40.4,18.1 ; 34.757,7.2 35.129,6.828 35.7,6.828 v1(35.7,4.549) 36.649,3.6 40.4,3.6 R32.1@40.4,4.4 R31.1@40.4,5.3 R29.1@40.4,6.2 R28.1@40.4,7.1 R26.1@40.4,8 R25.1@40.4,8.897 R23.1@40.4,9.8 R21.1@40.4,10.7 R19.1@40.4,11.6 R10.1@40.4,12.512 R8.1@40.4,13.4 R7.1@40.4,14.303 R5.1@40.4,15.187 R4.1@40.4,16.1 R2.1@40.4,17 R1.1@40.4,17.9
  Bottom Layer w0.4: RVAVDD.2@29.6,4.983 32.586,4.983 32.653,4.916 32.65,4.913 32.65,4.062 33.164,3.548 35.184,3.548 35.7,4.064 v1@35.7,4.537 ; U2.4@32.2,11.679 32.229,11.65 33.2,11.65 33.2,9.297 v1@34.4,9.297 ; v1(35.7,4.549) 35.7,5.5 35.9,5.7 36.645,5.7 36.85,5.905 36.85,6.55 36.7,6.7 PEL.2@36,6.7
AVDD_OUT: CP1.2 P1.5 RVAVDD.1 | length 4
  Bottom Layer w0.2: P1.5@27.9,3.305 27.914,3.291 P1.5@28.1,3.291 P1.5@28.608,3.291
  Bottom Layer w0.3: CP1.2@27.07,1.81 27.069,3.196 27.173,3.3 P1.5@27.84,3.3 ; P1.5@28.608,3.291 28.8,3.483 RVAVDD.1@29.6,3.483
CAM.DATA0: U1.19
CAM.DATA1: U1.20
CAM.DATA2: U1.21
CAM.DATA3: U1.22
CAM.DATA4: U1.23
CAM.DATA5: U1.24
CAM.DATA6: U1.25
CAM.DATA7: U1.27
CAM.HSYNC: U1.18 U3.23 | length 5.4
  Top Layer w0.2: v1@12.23,2.75 v1@12.28,2.8 ; U1.18@12.283,3.783 12.3,3.766 v1(12.3,2.975)
  Bottom Layer w0.2: v1@12.3,2.889 v1(12.3,2.975) 12.365,2.975 13.875,4.485 U3.23@13.875,6.675 U3.23@13.875,6.712
CAM.PCLK: U1.17 U3.22 | length 15
  Top Layer w0.2: v1(7.9,4.317) 8.317,3.9 9.132,3.9 9.225,3.993 11.49,3.993 U1.17@11.783,3.7 ; U1.17@11.767,3.816 U1.17@11.783,3.8
  Bottom Layer w0.2: v1(7.9,4.317) 10.017,2.2 12.6,2.2 13.6,3.2 13.6,3.433 14.275,4.108 U3.22@14.275,6.675
CAM.VSYNC: U1.28
CS#: ADC1.39 R37.1 U1.38 U3.15 | length 26.8
  Top Layer w0.2: U1.38@19.958,7.057 20.591,7.057 20.642,7.006 23.494,7.006 23.9,6.6 v1(23.9,6.5) ; ADC1.39@25.034,11.974 26.648,11.974 27.368,12.694 27.832,12.694 28.16,12.366 28.16,10.668 ; v1(26.934,9.991) 27.083,10.14 27.632,10.14 27.96,10.468 27.96,10.478 28.15,10.668
  Bottom Layer w0.2: U3.15@17.075,6.675 17.075,5.619 18.272,4.422 18.605,4.422 19.887,3.14 21.745,3.14 22.214,3.609 22.214,4.116 22.26,4.162 22.26,4.265 22.7,4.705 22.7,4.868 22.7,5.332 23.968,6.6 23.968,6.712 26.04,8.784 R37.1@26.04,9.25 ; R37.1@26.1,9.2 26.143,9.2 v1(26.934,9.991)
CS_NRF#: U1.36 U3.16 | length 14.6
  Top Layer w0.2: U1.36@19.958,6.057 20.107,6.206 21.002,6.206 21.208,6 21.514,6 21.635,5.879 22.921,5.879 23.341,5.459 v1@23.341,5.057 ; v1@23.2,5.16 v1(23.26,5.1)
  Bottom Layer w0.2: U3.16@16.675,6.675 16.675,5.524 18.127,4.072 18.46,4.072 19.742,2.79 21.89,2.79 22.564,3.464 22.564,3.971 22.61,4.017 22.61,4.12 23.1,4.61 23.107,4.61 23.298,4.801 v1@23.298,5.062
DEC1: C38.1 U3.1 | length 4
  Bottom Layer w0.2: U3.1@18.7,11.9 18.7,12.966 19.541,13.807 19.9,13.807 19.9,14.475 20.025,14.6 C38.1@20.6,14.6
DEC2: C44.2 U3.32 | length 2
  Bottom Layer w0.2: C44.2@10.727,10.496 10.923,10.3 U3.32@12.65,10.3
DEC3: C43.1 U3.33 | length 2.1
  Bottom Layer w0.2: C43.1@10.889,11.5 10.942,11.5 11.742,10.7 U3.33@12.65,10.7
DEC4: C33.2 L5.1 U3.46 | length 3
  Bottom Layer w0.2: C33.2@16,14.375 16.164,14.539 L5.1@17.005,14.539 ; L5.1@17,14.575 17.075,14.5 U3.46@17.075,12.725
DGND: ADC1.33 ADC1.38 ADC1.41 ADC1.49 ADC1.51 C1.1 C2.1 C10.1 C24.1 C25.1 C26.1 C27.1 C28.1 C29.1 C30.1 C31.1 C32.1 C33.1 C34.2 C37.2 C38.2 C39.2 C40.2 C41.2 C42.2 C43.2 C44.1 C45.1 C47.2 CC1.1 CC2.1 CC3.1 CC4.1 CC6.1 CC7.1 CC22.1 CC23.1 CC24.1 CC25.1 CONN_BAT.2 CONN_P_S.2 CW1.1 CW2.1 D1.2 D2.2 PJ.2 PW1.1 PW1.5 PW1.9 PW1.15 PW1.17 PW1.21 PW2.0 PW2.3 R3.2 R13.2 R27.2 R30.2 R33.2 RJ.1 SW.1 SW.6 U1.49 U1.65 U3.31 U3.45 U3.49 X3.2 X3.4 XX2.2 XX3.2 YW.2 | length 118.8
  Top Layer w0.2: PW1.15@4.55,16.4 5.4,16.4 PW1.21@5.7,16.7 ; CC23.1@4.62,13.05 5.293,13.05 CC22.1@5.4,12.943 ; PW1.17@6,15.45 PW1.21@6,16.6 ; PW1.9@6,19.35 6,18 PW1.21@6.1,17.9 ; PW1.21@7.4,16.7 7.7,16.4 PW1.1@8.45,16.4 ; PW1.21@7.4,18.2 7.6,18.4 PW1.5@8.45,18.4 8.3,18.55 8.3,20.6 8.68,20.6 CC2.1@8.7,20.62 ; C25.1@8.432,9.557 C25.1@8.432,9.697 ; CC24.1@9.5,14.7 9.5,15.15 9.854,15.15 10,15.296 10,16.511 10.196,16.707 10.907,16.707 11,16.8 11,17.292 ; 10.05,15.546 10.196,15.4 YW.2@10.55,15.4 ; CC25.1@11.808,18.1 CC25.1@11.85,18.1 CC25.1@11.85,18.03 ; CC25.1@11.845,18.03 11.845,17.483 12.827,16.5 v3(12.879,16.5) 13.376,16.5 13.381,16.495 C29.1@13.381,15.819 ; C10.1@12.5,15.825 13.375,15.825 C29.1@13.381,15.819 ; v1@12.533,1.25 v1@12.7,1.25 ; v1(12.7,1.275) v1@12.7,1.38 ; CONN_BAT.2@13.2,18.55 13.2,17.65 14.354,17.65 15.983,19.28 16.103,19.28 ; C29.1@13.381,15.8 C29.1@13.381,15.819 ; C29.1@13.4,15.8 C29.1@13.381,15.819 ; C28.1@15.25,1.383 16.117,1.383 C32.1@16.2,1.3 ; CW2.1@15.7,15.776 16.585,15.776 CW1.1@16.603,15.793 ; C32.1@16.167,1.268 16.335,1.1 19.615,1.1 19.945,1.43 C31.1@19.945,1.59 ; U1.65@17.6,10.4 19.283,12.083 U1.49@19.283,12.782 ; C27.1@22.4,7.557 22.601,7.356 23.639,7.356 23.935,7.06 24.132,7.06 24.992,6.2 25.034,6.2 ; C30.1@23.061,6.379 23.883,5.557 24.494,5.557 25.034,6.097 25.034,6.2 ; ADC1.38@24.494,12.484 ADC1.38@24.5,12.478 ; v3(24.7,2.303) 26.269,2.303 26.372,2.2 26.672,2.5 CC7.1@26.869,2.303 ; 25.034,6.206 25.034,6.2 ; ADC1.49@26.84,6.2 25.034,6.2 ; CC7.1@26.884,2.326 CC6.1@27.86,2.326 ; ADC1.49@26.884,5.624 26.884,4.225 ; 26.889,4.23 26.884,4.225 ; CC7.1@26.9,2.3 26.3,2.9 26.3,3.646 26.53,3.876 26.535,3.876 26.884,4.225 ; ADC1.49@26.9,6.057 26.9,6.976 27.884,6.976 ADC1.51@27.884,5.624
  Top Layer w0.4: C1.1@19,16.007 19,16.487 v1@19.325,16.812
  Signal Layer 1 w0.2: v2(13.875,7.9) v2@13.875,9.029 ; v2(13.875,9.1) 14.997,9.1 v2@15.06,9.036 ; v2(13.875,10.3) v2(13.875,11.5) ; v2@13.881,10.3 v2(15.075,10.3) ; v2@15.075,10.321 v2@15.075,11.485 ; v2@15.123,7.9 15.075,7.948 v2(15.075,9.1) v2(16.275,9.1) ; v2@15.196,10.3 v2@16.263,10.3 ; v2@16.275,7.924 v2(16.275,9.1) ; v2@16.275,10.321 v2@16.275,11.488 ; v2@16.343,10.3 v2@17.473,10.3 ; v2@17.475,7.925 v2(17.475,9.1) v2(16.275,9.1) ; v2(17.475,10.3) v2(17.475,11.5)
  Bottom Layer w0.2: R27.2@2.108,18.5 R27.2@2.195,18.5 ; R27.2@2.36,18.732 2.3,18.672 2.3,18.308 2.868,17.74 2.881,17.74 3,17.621 3,16.249 ; 3.02,16.249 3.548,16.249 ; CONN_P_S.2@3.51,14.718 3.51,16.211 3.548,16.249 ; 3.55,16.251 3.548,16.249 ; 3.854,16.249 3.548,16.249 ; 3.855,16.25 6.654,16.25 7.681,17.276 ; XX3.2@6.666,7.766 7.685,7.766 XX2.2@7.7,7.751 ; XX2.2@7.625,7.525 7.625,7.651 XX2.2@7.674,7.7 ; XX2.2@7.685,7.525 8.325,7.525 9.2,8.4 9.8,8.4 C45.1@10.757,8.4 ; R33.2@7.7,19 R30.2@7.7,18.069 7.7,17.314 7.737,17.276 7.728,17.268 8.638,17.268 CC4.1@8.664,17.242 ; v1(8.5,5.3) 8.693,5.3 8.923,5.529 SW.1@9.6,5.529 ; X3.2@9.44,14.303 9.237,14.1 C40.2@8.5,14.1 8.5,13.9 8.396,13.9 8,13.504 8,12.696 8.146,12.55 8.465,12.55 9.7,11.315 C44.1@9.7,10.5 C44.1@9.7,10.4 ; SW.1@9.537,5.75 SW.1@9.607,5.68 ; SW.1@9.6,5.91 9.6,6.033 10.067,6.5 11.839,6.5 12,6.339 ; X3.2@9.607,14.29 10.082,14.29 10.082,13.618 10.135,13.565 10.661,13.565 10.757,13.47 X3.4@10.757,13.05 ; X3.2@9.607,14.354 9.607,15.193 C34.2@9.714,15.3 ; C44.1@9.746,10.5 10.29,9.956 ; 10.3,9.925 10.325,9.9 U3.31@12.65,9.9 ; 12.001,6.34 12.1,6.24 SW.6@12.1,5.529 ; C42.2@12.4,15.7 12.4,16.406 12.493,16.499 v3(12.879,16.5) ; PW2.0@13.4,19.2 PW2.3@14.7,19.2 15.541,19.2 15.596,19.255 16.512,19.255 CC3.1@17.005,18.762 ; C33.1@16,15.643 C33.1@16.095,15.643 ; C33.1@16.164,15.643 C33.1@16.095,15.643 ; U3.49@16.675,11.625 U3.49@16.8,11.5 ; CC3.1@17,18.851 CC3.1@17.005,18.856 ; U3.49@17.508,7.933 18.47,6.972 ; 18.477,6.989 18.477,6.74 C47.2@19.9,5.317 ; C39.2@19.21,15.782 19.21,16.457 17.496,16.457 17.346,16.307 16.771,16.307 16.564,16.1 16.552,16.1 C33.1@16.095,15.643 ; C39.2@19.215,15.782 19.215,16.748 v1@19.311,16.844 ; R3.2@24.8,1.7 v3@24.8,2.179
  Bottom Layer w0.3: U3.31@12.65,9.9 U3.49@13.6,9.9 ; U3.49@16.675,11.625 U3.45@16.675,12.725
  other v1: 7,6.252 24,16.2 7.125,16.844 19.4,16.9 23.979,17.157 21.279,19.8 22.69,19.8 13.979,20.7
  other v2: 15.075,7.9 16.275,7.9 17.475,7.9 16.275,10.3 15.075,11.5 16.275,11.5